# Altium PCB ardu-shield.PcbDoc
Units mil, origin at the board's own origin, x right, y up, seen from the top; angles counter-clockwise.
Board outline 2925 x 2675 mil, 2 copper layers (Top Layer, Bottom Layer); 38 components, 30 nets, 141 pads, 7 vias.
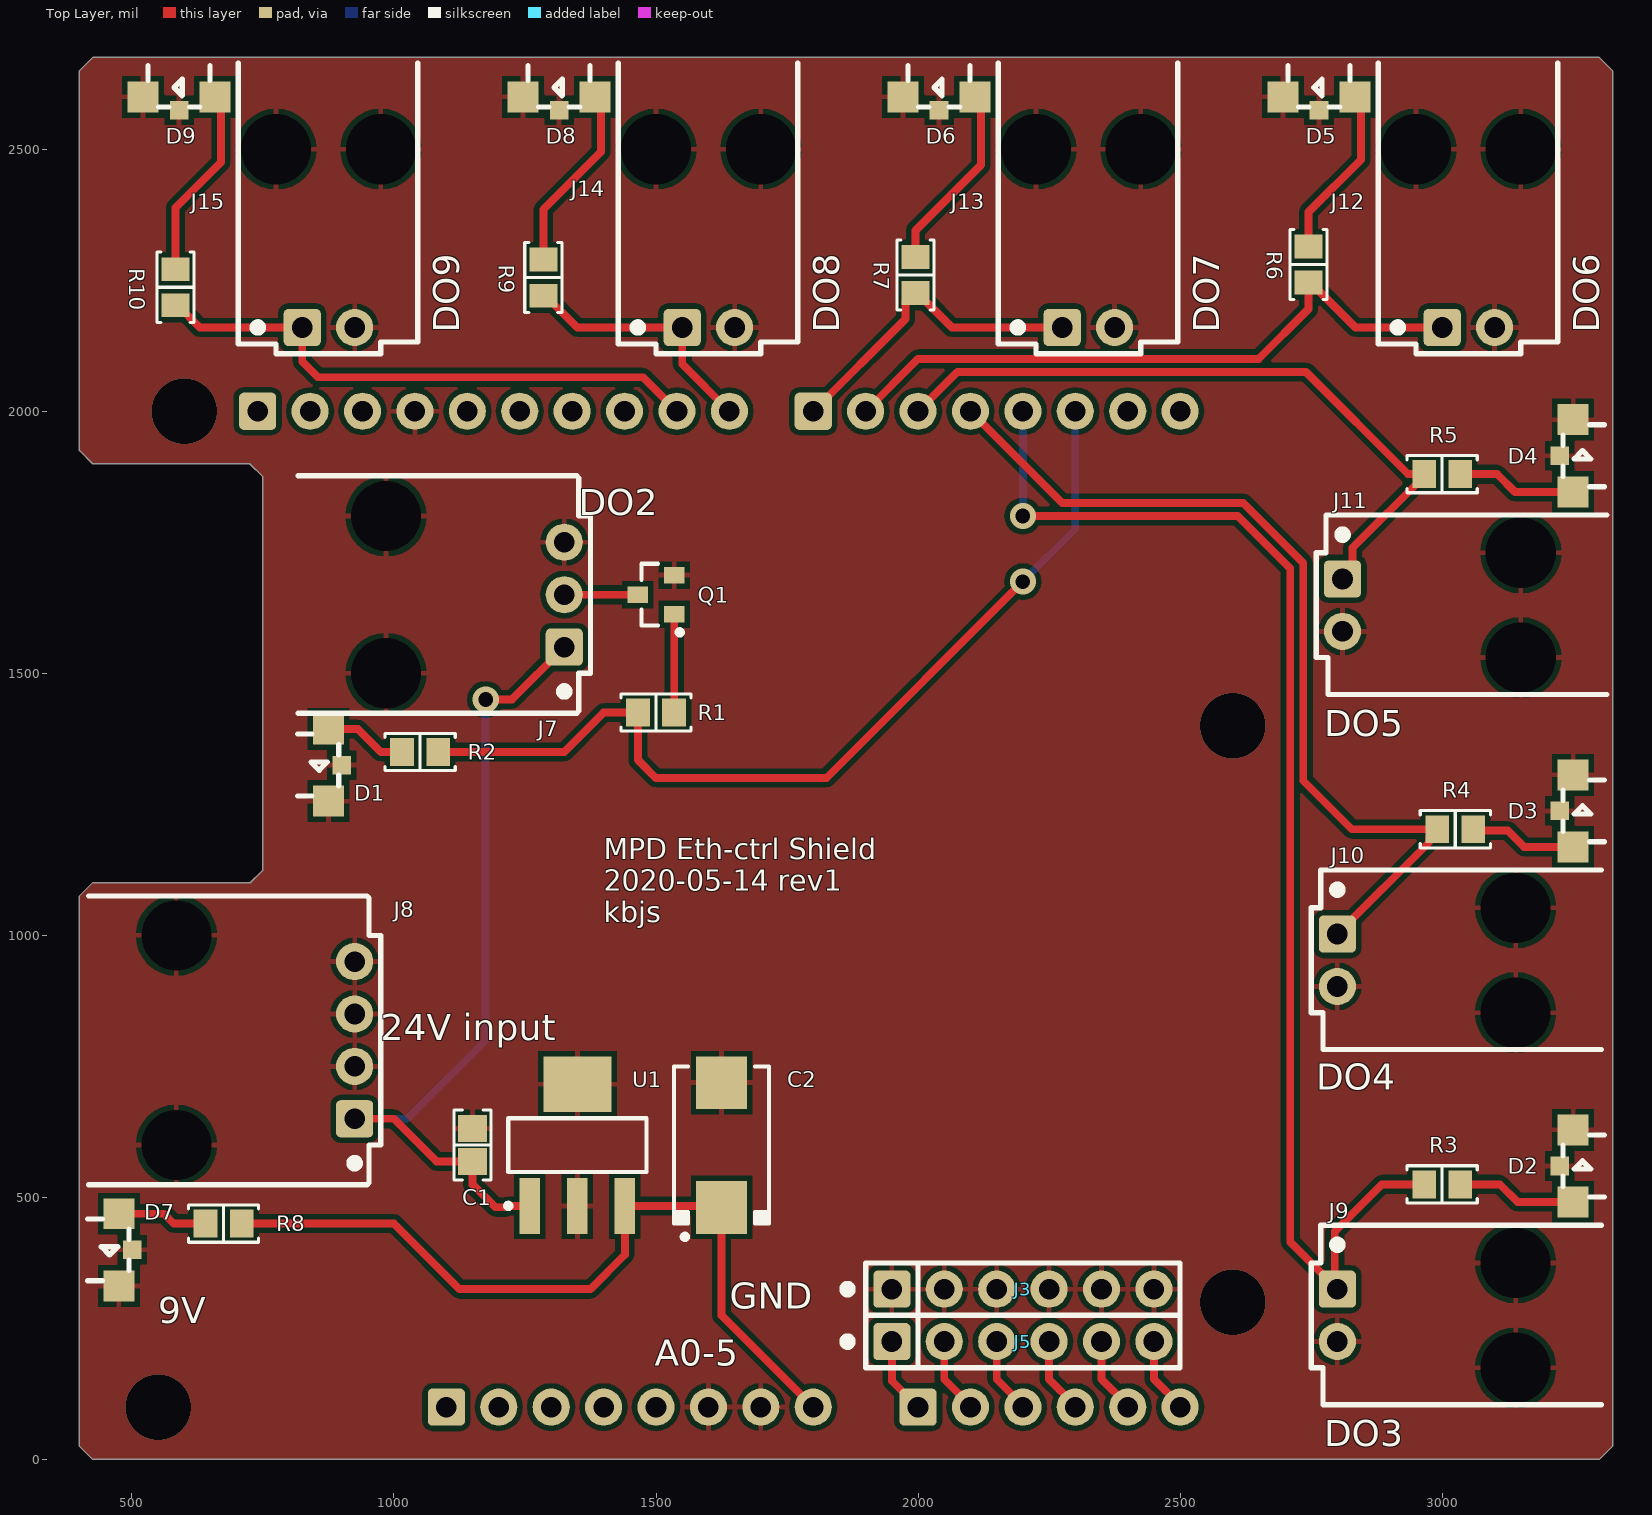
[diagram p0: Top Layer view]
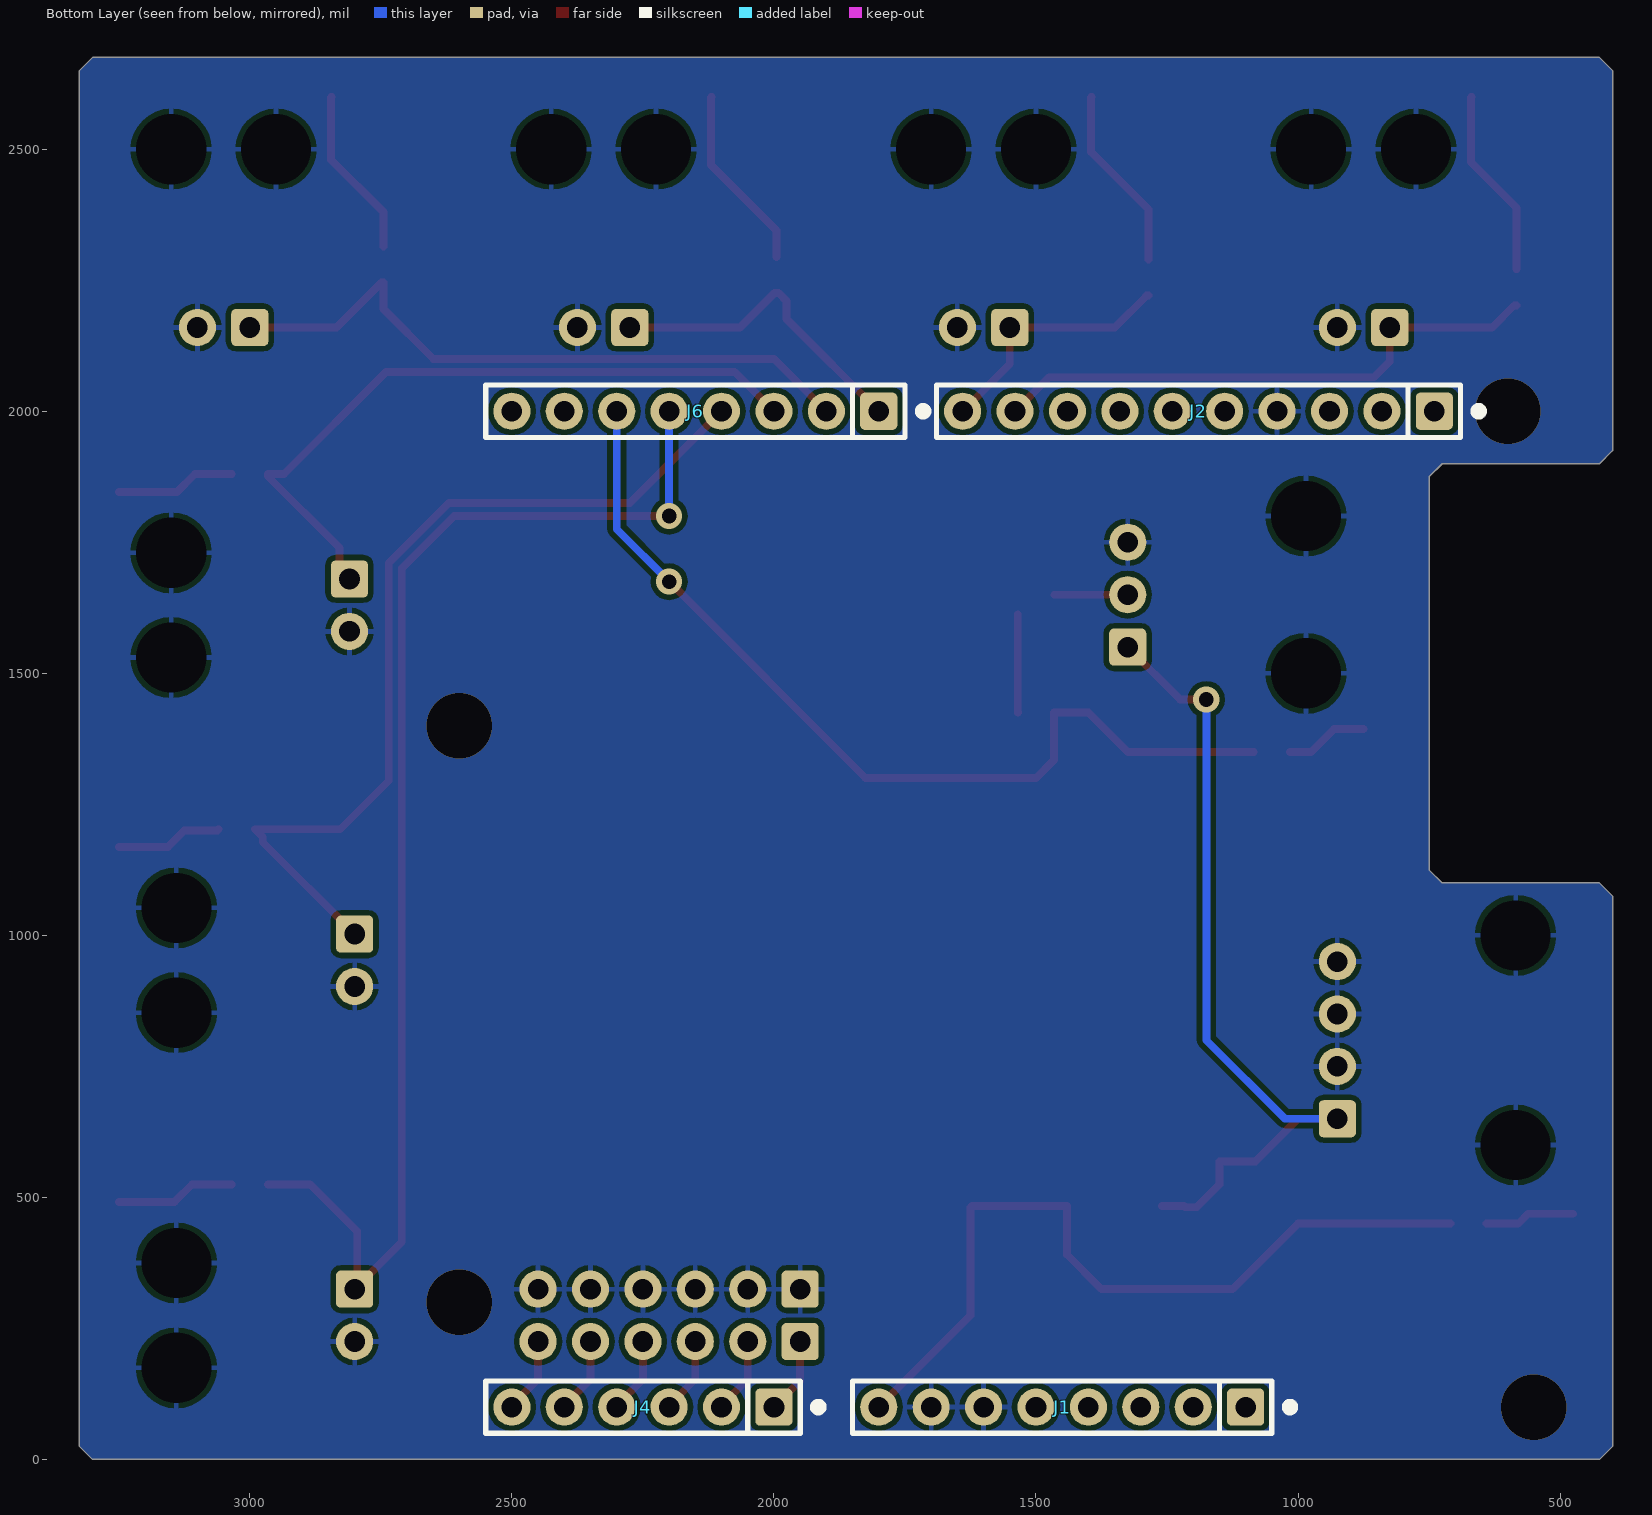
[diagram p1: Bottom Layer view, seen from below]
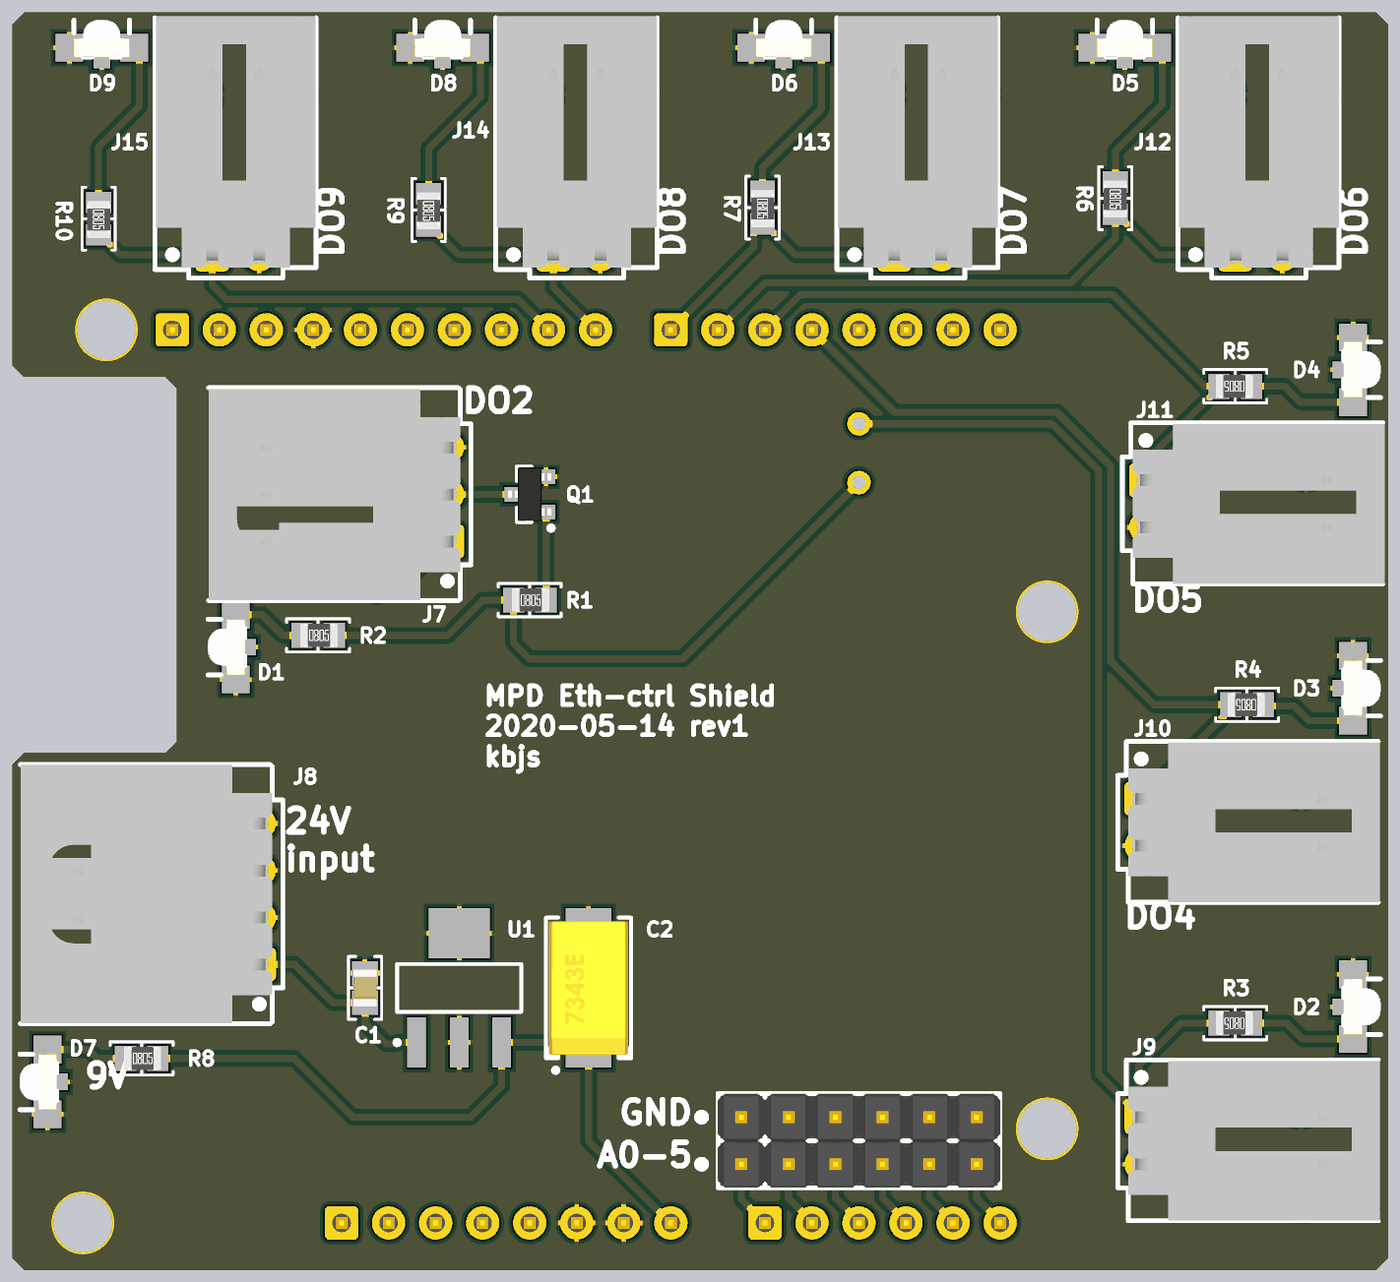
[diagram p2: 3D render of the assembled board from above, using the file's embedded part models]
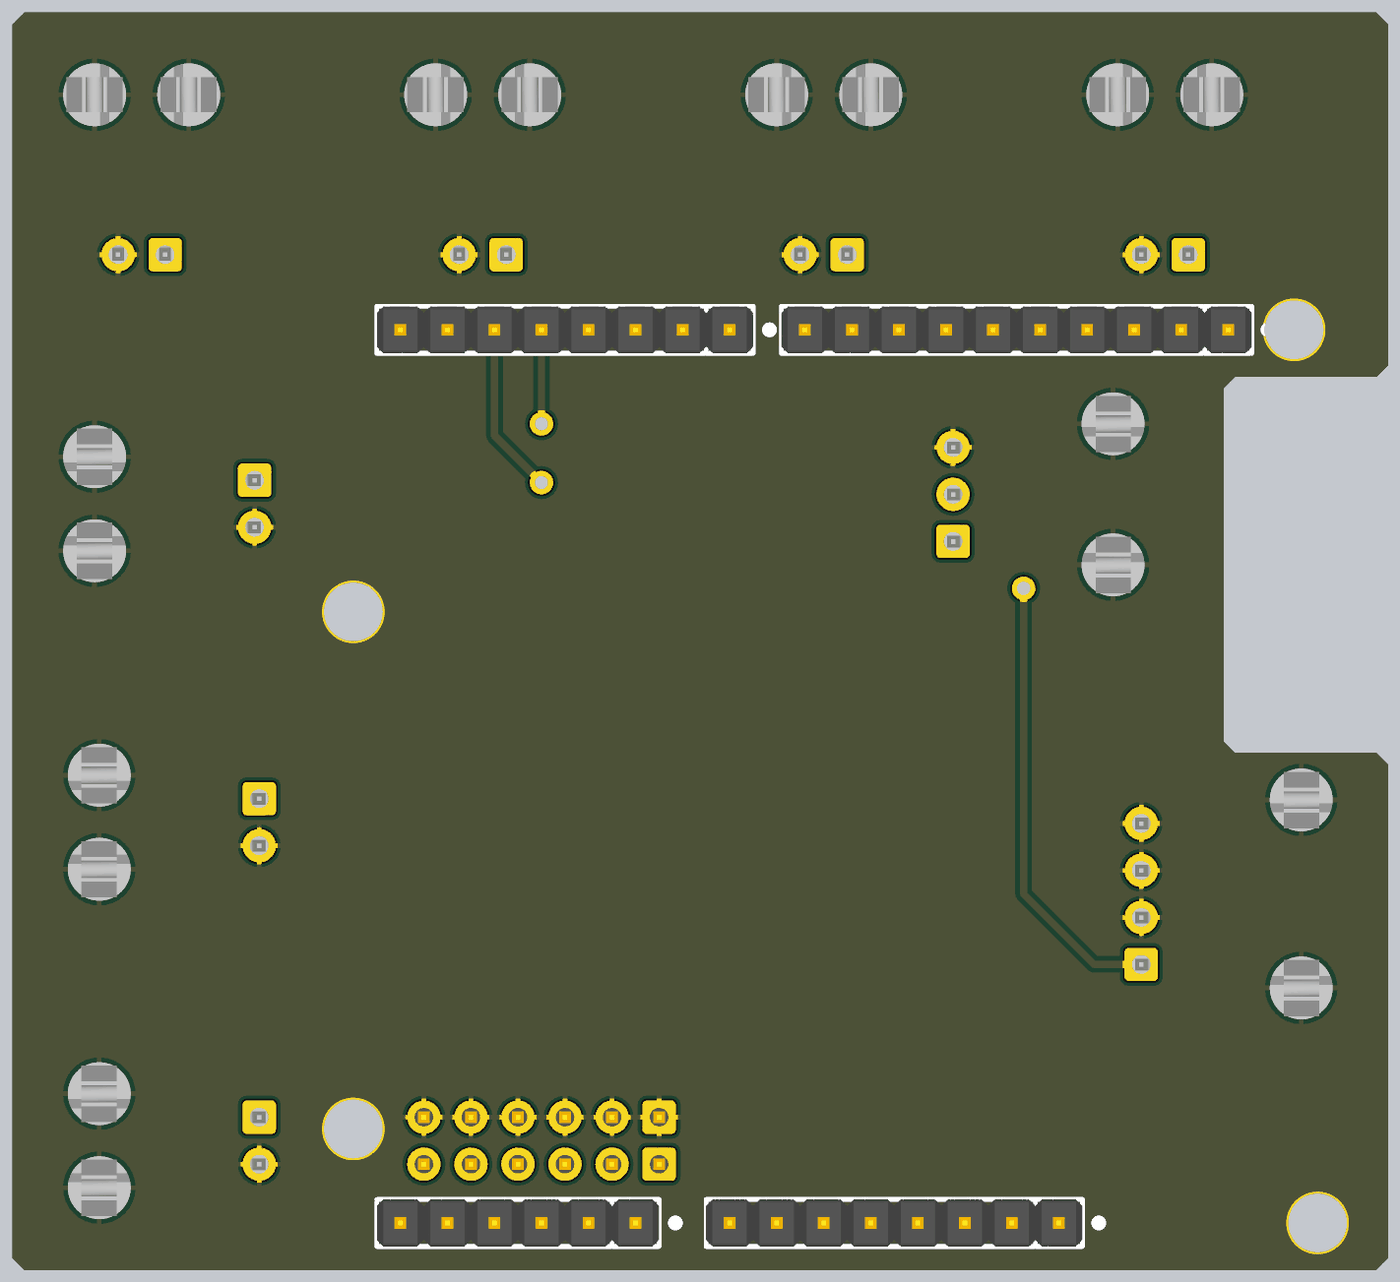
[diagram p3: 3D render of the assembled board from below, using the file's embedded part models]

## Layer stack, top to bottom
Top Solder: solder mask 0.4, Solder Resist, Dk 3.5
Top Layer: signal copper 1.4
Dielectric 1: dielectric 12.6, FR-4, Dk 4.8
Bottom Layer: signal copper 1.4
Bottom Solder: solder mask 0.4, Solder Resist, Dk 3.5

## Board outline
3325,25 3300,0 425,0 400,25 400,1075 425,1100 725,1100 750,1125 750,1875 725,1900 425,1900 400,1925 400,2650 425,2675 3300,2675 3325,2650

## Design rules (kind name [scope] priority, off if disabled: settings)
Clearance [All] p1: gap=10 ignorepadtopadclearanceinfootprint=FALSE except(0: Arc-Hole Track-Hole SMDPad-Hole THPad-Hole Via-Hole Fill-Hole Poly-Hole Region-Hole Text-Hole)
PolygonConnect [All] p1: connectstyle=Relief reliefconductorwidth=10 reliefentries=4 polygonreliefangle="90 Angle" airgapwidth=10
RoutingVias [All] p1: holewidth=28 width=50 viastyle="Through Hole" minholewidth=28 minwidth=50 maxholewidth=28 maxwidth=50
SolderMaskExpansion [All] p1: expansion=4 istentingtop=FALSE
Width [All] p1: maxlimit=100 minlimit=10 preferedwidth=15 minimp=50.000000 maximp=50.000000 favimp=50.000000
30 further rules are at their usual default settings.

## Components (designator, comment, footprint, x,y, rotation, side; value= is the part's Value field where it differs from the comment)
C1 "0.47µF" "CAP 0805_2012" 1150,600 r270 top
C2 "22µF" "CAP POL 2917_7343" 1625,600 r90 top
D1 "LED Yellow" APA3010 875,1325 r90 top
D2 "LED Yellow" APA3010 3250,560 r270 top
D3 "LED Yellow" APA3010 3250,1237.5 r270 top
D4 "LED Yellow" APA3010 3250,1915 r270 top
D5 "LED Yellow" APA3010 2765,2600 r0 top
D6 "LED Yellow" APA3010 2040,2600 r0 top
D7 "LED Green" APA3010 475,400 r90 top
D8 "LED Yellow" APA3010 1315,2600 r0 top
D9 "LED Yellow" APA3010 590,2600 r0 top
J1 "Uno Power" "Pin Header 1x8 TH Pitch 2.54mm" 1100,100 r0 bottom
J2 "Uno Digital 2" "Pin Header 1x10 TH Pitch 2.54mm" 740,2000 r0 bottom
J3 "6 pin" "Pin Header 1x6 TH Pitch 2.54mm" 1950,325 r0 top
J4 "Uno Analog" "Pin Header 1x6 TH Pitch 2.54mm" 2000,100 r0 bottom
J5 "6 pin" "Pin Header 1x6 TH Pitch 2.54mm" 1950,225 r0 top
J6 "Uno Digital 1" "Pin Header 1x8 TH Pitch 2.54mm" 1800,2000 r0 bottom
J7 "WM14053-ND" "Molex SL 70551* 3PIN" 1325,1550 r90 top
J8 "WM14054-ND" "Molex SL 70551* 4PIN" 925,650 r90 top
J9 "WM4236-ND" "Molex SL 70551* 2pin" 2800,325 r270 top
J10 "WM4236-ND" "Molex SL 70551* 2pin" 2800,1002.5 r270 top
J11 "WM4236-ND" "Molex SL 70551* 2pin" 2809.84,1680 r270 top
J12 "WM4236-ND" "Molex SL 70551* 2pin" 3000,2159.84 r0 top
J13 "WM4236-ND" "Molex SL 70551* 2pin" 2275,2159.84 r0 top
J14 "WM4236-ND" "Molex SL 70551* 2pin" 1550,2159.84 r0 top
J15 "WM4236-ND" "Molex SL 70551* 2pin" 825,2159.84 r0 top
Q1 "IRLML2060TRPBF" "INFINEON SOT-23-3" 1500,1650 r180 top (schematic designator IC1)
R1 "220 Ohms" "RES 0805_2012" 1500,1425 r0 top
R2 "280 Ohms" "RES 0805_2012" 1050,1350 r0 top
R3 "280 Ohms" "RES 0805_2012" 3000,525 r180 top
R4 "280 Ohms" "RES 0805_2012" 3025,1202.5 r180 top
R5 "280 Ohms" "RES 0805_2012" 3000,1880 r180 top
R6 "280 Ohms" "RES 0805_2012" 2745,2280 r270 top
R7 "280 Ohms" "RES 0805_2012" 1995,2260 r270 top
R8 "576 Ohms" "RES 0805_2012" 675,450 r0 top
R9 "280 Ohms" "RES 0805_2012" 1285,2255 r270 top
R10 "280 Ohms" "RES 0805_2012" 583.39,2236.57 r270 top
U1 "LM2940-N" SOT223_M 1350,600 r90 top

## Footprints (in the part's own frame and the unit in brackets; to place one, negate y for a bottom-side part, rotate by r counter-clockwise, add the part's x,y. Pads: shape width x height; smd on the part's side, far side on the other; paste and mask are expansions set on the pad)
APA3010 [mm]
  rect 1.5x1.5 smd: 1(-1.75,0) 2(1.75,0)
  rect 0.9x0.9 smd: NC(0,-0.65)
  silkscreen extent -1.5,-0.5 1.5,1.5, body extent -1.5,-0.5 1.5,1.5, height 1.05
"CAP 0805_2012" [mm] "Chip Capacitor, 2-Leads, Body 2.00x1.20mm, IPC Medium Density"
  rect 1.3x1.4 smd: 1(-0.8,0) 2(0.8,0)
  silkscreen extent -1.7,-0.9 1.7,0.9, body extent -1,-0.64 1,0.64, height 1.26
"CAP POL 2917_7343" [mm] "Molded Capacitor, 2-Leads, Body 7.30x4.30mm, IPC Medium Density"
  rect 2.55x2.45 smd: 1(-3.025,0) 2(3.025,0)
  silkscreen extent -4.57,-2.3 3.8,2.3, body extent -3.65,-2.15 3.65,2.15, height 4.1
"INFINEON SOT-23-3" [mm] "SOT23, 3-Leads, Body 2.90x2.40mm, Pitch 0.95mm, IPC Medium Density"
  rect 0.972x0.802 smd: 1(-0.885,0.95) 2(-0.885,-0.95) 3(0.885,0)
  silkscreen extent -1.28,-1.5 0.7,1.95, body extent -1.16,-1.45 1.16,1.45, height 1
"Molex SL 70551* 2pin" [mm]
  rrect25% 1.8x1.8 hole 1: 1(0,0)
  round 1.8 hole 1: 2(2.54,0)
  round 1.524 hole 3.4 unplated: MH(-1.27,8.64) MH(3.81,8.64)
  silkscreen extent -3.1,-1.27 5.6,12.8, body extent -3.04,-0.7 5.59,12.89, height 6.96
"Molex SL 70551* 3PIN" [mm]
  rrect25% 1.8x1.8 hole 1: 1(0,0)
  round 1.8 hole 1: 2(2.54,0) 3(5.08,0)
  round 1.524 hole 3.4 unplated: MH(-1.27,8.64) MH(6.35,8.64)
  silkscreen extent -3.2,-1.27 8.3,12.9, body extent -3.19,-0.7 8.24,12.89, height 6.96
"Molex SL 70551* 4PIN" [mm]
  rrect25% 1.8x1.8 hole 1: 1(0,0)
  round 1.8 hole 1: 2(2.54,0) 3(5.08,0) 4(7.62,0)
  round 1.524 hole 3.4 unplated: MH(-1.27,8.64) MH(8.89,8.64)
  silkscreen extent -3.2,-1.27 10.8,12.9, body extent -3.18,-0.7 10.78,12.89, height 6.96
"Pin Header 1x6 TH Pitch 2.54mm" [mm] "PinHeader 1x6 TH Pitch 2.54mm"
  rrect25% 1.8x1.8 hole 1: 1(0,0)
  round 1.8 hole 1: 2(2.54,0) 3(5.08,0) 4(7.62,0) 5(10.16,0) 6(12.7,0)
  silkscreen extent -2.3,-1.27 13.97,1.27, body extent -1.27,-1.27 13.97,1.27, height 9.5
"Pin Header 1x8 TH Pitch 2.54mm" [mm] "PinHeader 1x8 TH Pitch 2.54mm"
  rrect25% 1.8x1.8 hole 1: 1(0,0)
  round 1.8 hole 1: 2(2.54,0) 3(5.08,0) 4(7.62,0) 5(10.16,0) 6(12.7,0) 7(15.24,0) 8(17.78,0)
  silkscreen extent -2.3,-1.27 19.05,1.27, body extent -1.27,-1.27 19.05,1.27, height 9.5
"Pin Header 1x10 TH Pitch 2.54mm" [mm] "PinHeader 1x10 TH Pitch 2.54mm"
  rrect25% 1.8x1.8 hole 1: 1(0,0)
  round 1.8 hole 1: 2(2.54,0) 3(5.08,0) 4(7.62,0) 5(10.16,0) 6(12.7,0) 7(15.24,0) 8(17.78,0) 9(20.32,0) 10(22.86,0)
  silkscreen extent -2.3,-1.27 24.13,1.27, body extent -1.27,-1.27 24.13,1.27, height 9.5
"RES 0805_2012" [mm] "Chip Resistor, 2-Leads, Body 2.00x1.25mm, IPC Medium Density"
  rect 1.15x1.35 smd: 1(-0.875,0) 2(0.875,0)
  silkscreen extent -1.7,-0.9 1.7,0.9, body extent -0.95,-0.62 1.05,0.63, height 0.6
SOT223_M [mm] "SOT223, 4-Leads, Body 6.5x3.5mm, Pitch 2.3mm, Lead Span 7mm, IPC Low Density"
  rect 2.7x1 smd: 1(-2.95,2.3) 2(-2.95,0) 3(-2.95,-2.3)
  rect 2.7x3.3 smd: 4(2.95,0)
  silkscreen extent -3.07,-3.35 1.3,3.47, body extent -1.85,-3.35 1.85,3.35, height 1.7

## Part data
C1: library part C0805C474K5RACAUTO, "CAP CER 0.47UF 50V X7R 0805", Device Package="0805 (2012 Metric)", Manufacturer=KEMET, Operating Temperature="-55°C ~ 125°C", Ratings=AEC-Q200, Supplier Part Number 1=399-6976-1-ND, Temperature Coefficient=X7R, Tolerance=±10%, Voltage - Rated=50V, Applications="Automotive, Bypass, Decoupling", Capacitance=0.47µF, ComponentLink1Description=Datasheet, ComponentLink1URL=https://api.kemet.com/component-edge/download/datasheet/C0805C474K5RACAUTO.pdf, ComponentLink2Description="DigiKey Link", ComponentLink2URL=http://digikey.com/product-detail/en/kemet/C0805C474K5RACAUTO/399-6976-1-ND/3314485, LastUpdated="1/21/2020 12:03:05 AM", Lifecycle Status=Active, Minimum Order=1, Mounting Type="Surface Mount, MLCC", Package / Case="0805 (2012 Metric)", Packaging=TapeAndReel, Part Number=C0805C474K5RACAUTO, Part Status=Active, PartId=2727, Price=0.08, Series="SMD Auto X7R", Size / Dimension="0.079\" L x 0.049\" W (2.00mm x 1.25mm)", Supplier 1=DigiKey, Thickness (Max)="0.043\" (1.10mm)"
C2: library part T491D226K025AT, "CAP TANT 22UF 10% 25V 2917", Device Package="2917 (7343 Metric)", ESR (Equivalent Series Resistance)=800mOhm, Lifetime @ Temp.="2000 Hrs @ 125°C", Manufacturer=KEMET, Manufacturer Size Code=D, Operating Temperature="-55°C ~ 125°C", Supplier Part Number 1=399-3782-1-ND, Tolerance=±10%, Voltage - Rated=25V, Capacitance=22µF, ComponentLink1Description=Datasheet, ComponentLink1URL=https://api.kemet.com/component-edge/download/datasheet/T491D226K025AT.pdf, ComponentLink2Description="DigiKey Link", ComponentLink2URL=http://digikey.com/product-detail/en/kemet/T491D226K025AT/399-3782-1-ND/819107, Features="General Purpose", Height - Seated (Max)="0.122\" (3.10mm)", LastUpdated="1/21/2020 2:02:25 AM", Lifecycle Status=Active, Minimum Order=1, Mounting Type="Surface Mount", Package / Case="2917 (7343 Metric)", Packaging=TapeAndReel, Part Number=T491D226K025AT, Part Status=Active, PartId=1471, Price=0.37, Series=T491, Size / Dimension="0.287\" L x 0.169\" W (7.30mm x 4.30mm)", Supplier 1=DigiKey, Type=Molded
D1 D2 D3 D4 D5 D6 D7 D8 D9: library part LED
J1 J6: library part "8 pin"
J2: library part "10 pin"
J4: library part "6 pin"
J7: library part "3 pin", Supplier 1=Digi-Key, Supplier Part Number 1=WM14053-ND
J8: library part "4 pin", Supplier 1=Digi-Key, Supplier Part Number 1=WM14054-ND
J9 J10 J11 J12 J13 J14 J15: library part "2 pin", Supplier 1=Digi-Key, Supplier Part Number 1=WM4236-ND
Q1: "MOSFET N-CH 60V 1.2A SOT23-3", Current - Continuous Drain (Id) @ 25°C="1.2A (Ta)", Device Package="TO-236-3, SC-59, SOT-23-3", Drain to Source Voltage (Vdss)=60V, Drive Voltage (Max Rds On,  Min Rds On)="4.5V, 10V", Input Capacitance (Ciss) (Max) @ Vds="64pF @ 25V", Manufacturer="Infineon Technologies", Operating Temperature="-55°C ~ 150°C (TJ)", Power Dissipation (Max)="1.25W (Ta)", Supplier Device Package=Micro3™/SOT-23, Supplier Part Number 1=IRLML2060TRPBFCT-ND, ComponentLink1Description=Datasheet, ComponentLink1URL=https://www.infineon.com/dgdl/irlml2060pbf.pdf?fileId=5546d462533600a401535664b7fb25ee, ComponentLink2Description="DigiKey Link", ComponentLink2URL=http://digikey.com/product-detail/en/infineon-technologies/IRLML2060TRPBF/IRLML2060TRPBFCT-ND/2271917, FET Type=N-Channel, Gate Charge (Qg) (Max) @ Vgs="0.67nC @ 4.5V", LastUpdated="1/21/2020 4:00:48 AM", Lifecycle Status=Active, Minimum Order=1, Mounting Type="Surface Mount", Package / Case="TO-236-3, SC-59, SOT-23-3", Packaging=TapeAndReel, Part Number=IRLML2060TRPBF, Part Status=Active, Price=0.10, Rds On (Max) @ Id, Vgs="480mOhm @ 1.2A, 10V", Series=HEXFET®, Supplier 1=DigiKey, Technology="MOSFET (Metal Oxide)", Vgs (Max)=±16V, Vgs(th) (Max) @ Id="2.5V @ 25µA"
R1: library part RR1220P-221-D, "RES SMD 220 OHM 0.5% 1/10W 0805", Device Package="0805 (2012 Metric)", Manufacturer=Susumu, Operating Temperature="-55°C ~ 125°C", Power (Watts)="0.1W, 1/10W", Supplier Part Number 1=RR12P220DCT-ND, Temperature Coefficient=±25ppm/°C, Tolerance=±0.5%, ComponentLink1Description=Datasheet, ComponentLink1URL=http://www.susumu.co.jp/common/pdf/n_catalog_partition05_en.pdf, ComponentLink2Description="DigiKey Link", ComponentLink2URL=http://digikey.com/product-detail/en/susumu/RR1220P-221-D/RR12P220DCT-ND/432814, Composition="Thin Film", Height - Seated (Max)="0.020\" (0.50mm)", LastUpdated="1/21/2020 1:45:01 AM", Lifecycle Status=Active, Minimum Order=1, Number of Terminations=2, Package / Case="0805 (2012 Metric)", Packaging=TapeAndReel, Part Number=RR1220P-221-D, Part Status=Active, PartId=39160, Price=0.01, Resistance="220 Ohms", Series=RR, Size / Dimension="0.079\" L x 0.049\" W (2.00mm x 1.25mm)", Supplier 1=DigiKey
R2 R3 R4 R5 R6 R7 R9 R10: library part RK73H2ATTD2800F, "RESISTOR", Device Package="0805 (2012 Metric)", Manufacturer="KOA Speer Electronics, Inc.", Operating Temperature="-55°C ~ 155°C", Power (Watts)="0.25W, 1/4W", Ratings=AEC-Q200, Supplier Device Package=0805, Supplier Part Number 1=2019-RK73H2ATTD2800FCT-ND, Temperature Coefficient=±100ppm/°C, Tolerance=±1%, ComponentLink1Description=Datasheet, ComponentLink1URL=http://www.koaspeer.com/catimages/Products/RK73H/RK73H.pdf, ComponentLink2Description="DigiKey Link", ComponentLink2URL=http://digikey.com/product-detail/en/koa-speer-electronics-inc/RK73H2ATTD2800F/2019-RK73H2ATTD2800FCT-ND/10234507, Composition="Thick Film", Features="Automotive AEC-Q200, Moisture Resistant", Height - Seated (Max)="0.024\" (0.60mm)", LastUpdated="1/21/2020 1:40:01 AM", Lifecycle Status=Active, Minimum Order=1, Number of Terminations=2, Package / Case="0805 (2012 Metric)", Packaging=CutTape, Part Number=RK73H2ATTD2800F, Part Status=Active, PartId=48310, Price=0.10, Resistance="280 Ohms", Series=RK73H, Size / Dimension="0.079\" L x 0.049\" W (2.00mm x 1.25mm)", Supplier 1=DigiKey
R8: library part RK73H2ATTD5760F, "RESISTOR", Device Package="0805 (2012 Metric)", Manufacturer="KOA Speer Electronics, Inc.", Operating Temperature="-55°C ~ 155°C", Power (Watts)="0.25W, 1/4W", Ratings=AEC-Q200, Supplier Device Package=0805, Supplier Part Number 1=2019-RK73H2ATTD5760FCT-ND, Temperature Coefficient=±100ppm/°C, Tolerance=±1%, ComponentLink1Description=Datasheet, ComponentLink1URL=http://www.koaspeer.com/catimages/Products/RK73H/RK73H.pdf, ComponentLink2Description="DigiKey Link", ComponentLink2URL=http://digikey.com/product-detail/en/koa-speer-electronics-inc/RK73H2ATTD5760F/2019-RK73H2ATTD5760FCT-ND/10234051, Composition="Thick Film", Features="Automotive AEC-Q200, Moisture Resistant", Height - Seated (Max)="0.024\" (0.60mm)", LastUpdated="1/21/2020 1:41:18 AM", Lifecycle Status=Active, Minimum Order=1, Number of Terminations=2, Package / Case="0805 (2012 Metric)", Packaging=CutTape, Part Number=RK73H2ATTD5760F, Part Status=Active, PartId=46940, Price=0.10, Resistance="576 Ohms", Series=RK73H, Size / Dimension="0.079\" L x 0.049\" W (2.00mm x 1.25mm)", Supplier 1=DigiKey

## Via types
v1: diameter 125, hole 125, Top Layer to Bottom Layer, 4 vias
v2: diameter 50, hole 28, Top Layer to Bottom Layer, 3 vias

## Nets (pads, with @x,y where several pads share a name; then routed paths per layer and width w, separated by ;. In a path a pad name is that pad's centre, name@x,y a point inside that pad or via, vN(x,y) a via of type N, cw(c..) or ccw(c..) an arc to the next point about the centre after c; other vN are vias at no path point)
5V: J1.5
9V: C2.1 J1.8 R8.2 U1.3 | length 1542.4
  Top Layer w15: R8.2 1000,450 1125,325 1375,325 1440.55,390.55 U1.3 1622.05,483.86 C2.1 1625,275 J1.8
24V: C1.2 J7.1 J8.1 U1.1 | length 1584.5
  Top Layer w15: J8.1 1000,650 1081.5,568.5 C1.2 1150,525 1193.79,481.21 1214.62,481.21 1217.26,483.86 U1.1 ; v2(1175,1450) 1225,1450 J7.1
  Bottom Layer w15: J8.1 1025,650 1175,800 v2(1175,1450)
24V_SW: J7.2 Q1.3 | length 140.2
  Top Layer w15: J7.2 Q1.3
DO2: J6.6 R1.1 R2.2 | length 1773.2
  Top Layer w15: R2.2 1325,1350 1400,1425 R1.1 1465.55,1334.45 1500,1300 1825,1300 v2(2200,1675)
  Bottom Layer w15: v2(2200,1675) 2300,1775 J6.6
GND: C1.1 C2.2 D1.1 D1.NC D2.1 D2.NC D3.1 D3.NC D4.1 D4.NC D5.1 D5.NC D6.1 D6.NC D7.1 D7.NC D8.1 D8.NC D9.1 D9.NC J1.6 J1.7 J2.4 J3.1 J3.2 J3.3 J3.4 J3.5 J3.6 J7.3 J7.MH J8.2 J8.3 J8.4 J8.MH J9.2 J9.MH J10.2 J10.MH J11.2 J11.MH J12.2 J12.MH J13.2 J13.MH J14.2 J14.MH J15.2 J15.MH Q1.2 U1.2 U1.4
  other v1: 550,100 2600,300 2600,1400 600,2000
NetD1_2: D1.2 R2.1 | length 158.7
  Top Layer w15: D1.2 931.1,1393.9 975,1350 R2.1
NetD2_2: D2.2 R3.1 | length 229.6
  Top Layer w15: R3.1 3110,525 3143.9,491.1 D2.2
NetD3_2: D3.2 R4.1 | length 204.6
  Top Layer w15: R4.1 3061.95,1200 3125,1200 3156.4,1168.6 D3.2
NetD4_2: D4.2 R5.1 | length 229.6
  Top Layer w15: R5.1 3105,1880 3138.9,1846.1 D4.2
NetD5_2: D5.2 R6.1 | length 327.4
  Top Layer w15: R6.1 2745,2380 2845,2480 2845,2598.9 D5.2@2843.9,2600
NetD6_2: D6.2 R7.1 | length 357.8
  Top Layer w15: R7.1 1995,2345 2120,2470 2120,2598.9 D6.2@2118.9,2600
NetD7_2: D7.2 R8.1 | length 173.4
  Top Layer w15: D7.2 561.1,468.9 580,450 R8.1
NetD8_2: D8.2 R9.1 | length 356.6
  Top Layer w15: R9.1 1285,2385 1395,2495 1395,2598.9 D8.2@1393.9,2600
NetD9_2: D9.2 R10.1 | length 365.3
  Top Layer w15: R10.1 583.39,2388.39 670,2475 670,2598.9 D9.2@668.9,2600
NetJ4_1: J4.1 J5.1 | length 145.7
  Top Layer w15: J5.1 1950,150 J4.1
NetJ4_2: J4.2 J5.2 | length 145.7
  Top Layer w15: J5.2 2050,153.31 2100,103.31 J4.2
NetJ4_3: J4.3 J5.3 | length 145.7
  Top Layer w15: J5.3 2150,153.31 2200,103.31 J4.3
NetJ4_4: J4.4 J5.4 | length 145.7
  Top Layer w15: J5.4 2250,153.31 2300,103.31 J4.4
NetJ4_5: J4.5 J5.5 | length 145.7
  Top Layer w15: J5.5 2350,153.31 2400,103.31 J4.5
NetJ4_6: J4.6 J5.6 | length 145.7
  Top Layer w15: J5.6 2450,153.31 2500,103.31 J4.6
NetQ1_1: Q1.1 R1.2 | length 187.8
  Top Layer w15: R1.2 1534.84,1425.39 Q1.1
RST: J1.3
TTL1: J6.5 J9.1 R3.2 | length 2486.5
  Top Layer w15: v2(2200,1800) 2610,1800 2710,1700 2710,415 J9.1@2795,330 ; J9.1 2795,320 J9.1@2795,330 ; R3.2 2885,525 2795,435 J9.1@2795,330
  Bottom Layer w15: v2(2200,1800) J6.5
TTL2: J6.4 J10.1 R4.2 | length 1743.1
  Top Layer w15: J6.4 2275,1825 2620.36,1825 2735,1710.36 2735,1295 2827.5,1202.5 R4.2 2975.41,1187.36 2975.41,1177.91 J10.1
TTL3: J6.3 J11.1 R5.2 | length 1341.9
  Top Layer w15: J6.3 2075,2075 2740,2075 2935,1880 R5.2 2965.55,1876.06 2828.92,1739.43 2828.92,1699.07 J11.1
TTL4: J6.2 J12.1 R6.2 | length 1266.8
  Top Layer w15: J6.2 2000,2100 2650,2100 2745,2195 R6.2 2748.94,2245.55 2834.65,2159.84 J12.1
TTL5: J6.1 J13.1 R7.2 | length 615.8
  Top Layer w15: J6.1 1975.93,2175.93 1975.93,2210.41 1991.06,2225.55 R7.2 1998.94,2225.55 2064.65,2159.84 J13.1
TTL6: J2.10 J14.1 R9.2 | length 487.3
  Top Layer w15: R9.2 1288.94,2220.55 1349.65,2159.84 J14.1 1550,2090 J2.10
TTL7: J2.9 J15.1 R10.2 | length 1078.3
  Top Layer w15: R10.2 587.33,2202.13 629.61,2159.84 J15.1 825,2095 855,2065 1475,2065 J2.9
pads on no net: J1.1 J1.2 J1.4 J2.1 J2.2 J2.3 J2.5 J2.6 J2.7 J2.8 J6.7 J6.8

## Polygon pours and split planes (outlines as drawn)
GND on Top Layer "GND_L01_P000" (solid, remove dead copper, pour order 0): 400,2650 400,1925 425,1900 725,1900 750,1875 750,1125 725,1100 425,1100 400,1075 400,25 425,0 3300,0 3325,25 3325,2650 3300,2675 425,2675
GND on Bottom Layer "GND_L02_P001" (solid, pour order 1): 400,2650 400,1925 425,1900 725,1900 750,1875 750,1125 725,1100 425,1100 400,1075 400,25 425,0 3300,0 3325,25 3325,2650 3300,2675 425,2675

## Silkscreen, mask and mechanical layers (free items; w line width, h text height)
Top Overlay:
  text "DO9" at 1125,2150 h50 r90
  text "DO8" at 1850,2150 h50 r90
  text "DO7" at 2575,2150 h50 r90
  text "DO6" at 3300,2150 h50 r90
  text "DO2" at 1352.56,1801.97 h50
  text "DO5" at 2775,1380 h50
  text "MPD Eth-ctrl Shield / 2020-05-14 rev1 / kbjs" at 1400,1025 h40
  text "24V input" at 975,800 h50
  text "DO4" at 2760,705 h50
  text "GND" at 1640.8,288.01 h50
  text "9V" at 550,260.28 h50
  text "A0-5" at 1497.97,178.48 h50
  text "DO3" at 2775,25 h50